# Altium PCB addl.PcbDoc
Units mm, origin at the board's own origin, x right, y up, seen from the top; angles counter-clockwise.
Board outline 82.66 x 56.61 mm, 2 copper layers (Top Layer, Bottom Layer); 78 components, 87 nets, 309 pads, 108 vias.
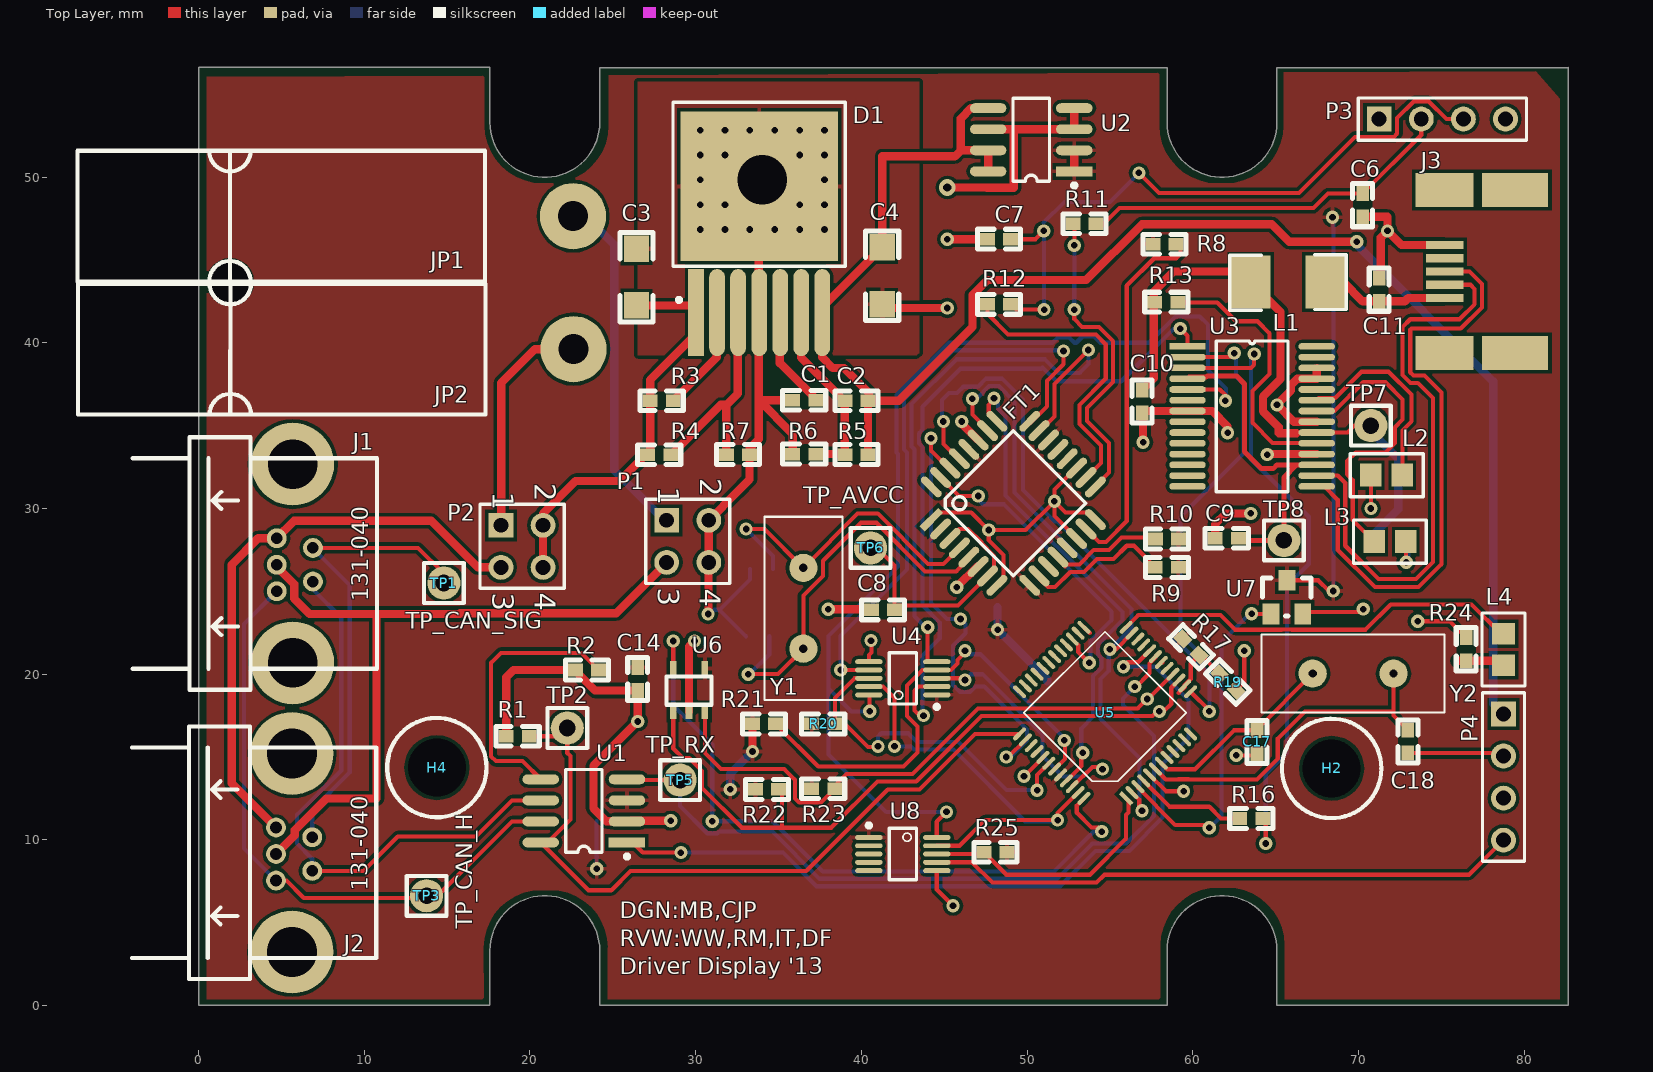
[diagram p0: Top Layer view]
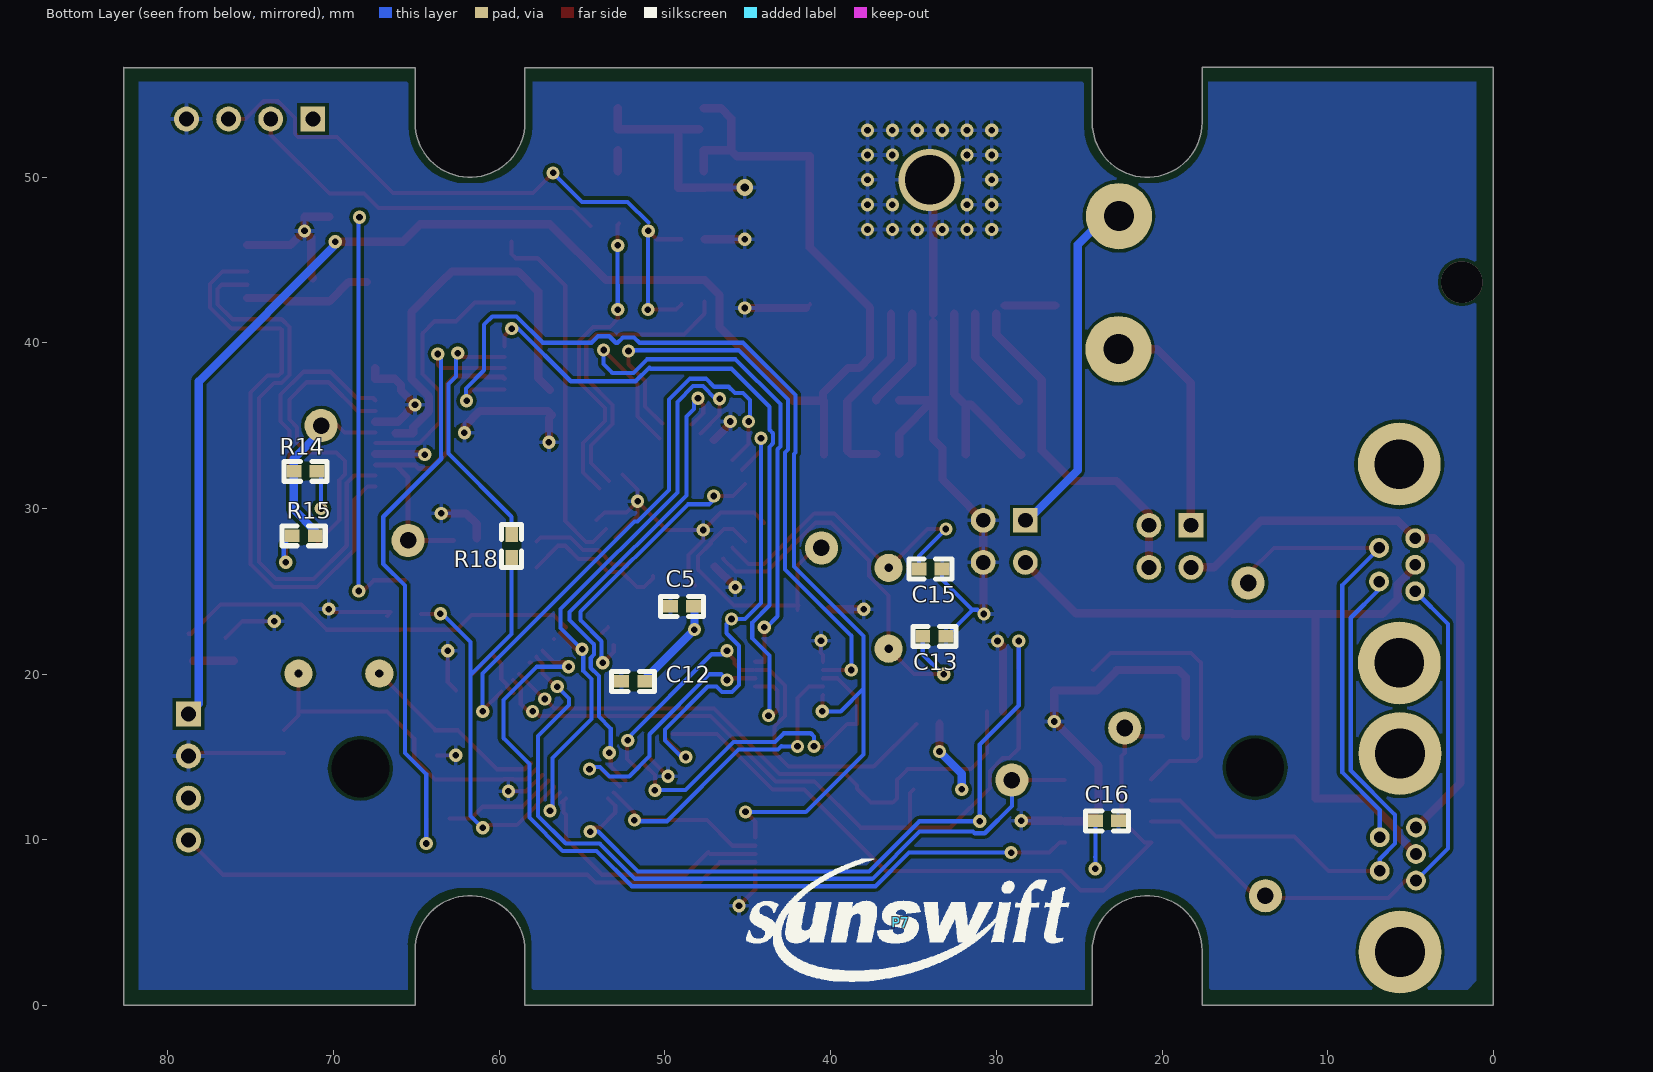
[diagram p1: Bottom Layer view, seen from below]

## Layer stack, top to bottom
Top Layer: signal copper 0.0356
Dielectric: core 0.32, FR-4, Dk 4.8
Bottom Layer: signal copper 0.0356

## Board outline
17.58,0.01 17.58,3.32 cw(c20.895,3.32) 24.21,3.32 24.21,0.01 58.45,0.01 58.45,3.32 cw(c61.765,3.32) 65.08,3.32 65.08,0.01 65.085,0.005 82.66,0.005 82.66,56.615 82.655,56.61 65.08,56.61 65.08,53.3 cw(c61.765,53.3) 58.45,53.3 58.45,56.61 24.21,56.61 24.21,53.3 cw(c20.895,53.3) 17.58,53.3 17.58,56.615 0,56.615 0,0.005 0.005,0.01

## Design rules (kind name [scope] priority, off if disabled: settings)
Clearance [All] p1: gap=0.2
ComponentClearance [All] p1: gap=0.05 collisioncheckmode=3 verticalgap=0.254 showdistances=FALSE
FabricationTestPointUsage TestPointUsage [All] p1: valid=0 allowmultiple=FALSE
FabricationTestpoint Testpoint [(IsPad And (OnTopLayer Or OnBottomLayer))] p1: side=3 testpointundercomponent=TRUE minsize=1.016 maxsize=2.54 preferedsize=1.524 minholesize=0 maxholesize=1.016 preferedholesize=0.813 testpointgrid=0.025 allowsidetop=TRUE allowsidebottom=TRUE usegrid=TRUE gridtolerance=0
HoleSize [All] p1: absolutevalues=TRUE maxlimit=6 minlimit=0.025 maxpercent=80.000 minpercent=20.000
HoleToHoleClearance [All] p1: gap=0.1 allowstackedmicrovias=TRUE
MinimumSolderMaskSliver [All] p1 off: minsoldermaskwidth=0.2
PolygonConnect [All] p1: connectstyle=Relief reliefconductorwidth=0.254 reliefentries=4 polygonreliefangle="90 Angle"
RoomDefinition USB-SERIAL [InComponentClass('USB-SERIAL')] p1 off: confinementstyle=ConfineIn formatcopy=TRUE lockcomponents=FALSE outline -67.26,-46.78 -16.46,-46.78 -16.46,-21.38 -67.26,-21.38
RoomDefinition main-sch [InComponentClass('main-sch')] p2 off: confinementstyle=ConfineIn formatcopy=TRUE lockcomponents=FALSE outline -67.26,-46.78 -16.46,-46.78 -16.46,-21.38 -67.26,-21.38
RoomDefinition LPC11C14 [InComponentClass('LPC11C14')] p3 off: confinementstyle=ConfineIn formatcopy=TRUE lockcomponents=FALSE outline -67.26,-46.78 -16.46,-46.78 -16.46,-21.38 -67.26,-21.38
RoomDefinition FT311D [InComponentClass('FT311D')] p4 off: confinementstyle=ConfineIn formatcopy=TRUE lockcomponents=FALSE outline -67.26,-46.78 -16.46,-46.78 -16.46,-21.38 -67.26,-21.38
RoomDefinition DC-DC [InComponentClass('DC-DC')] p5 off: confinementstyle=ConfineIn formatcopy=TRUE lockcomponents=FALSE outline -67.26,-46.78 -16.46,-46.78 -16.46,-21.38 -67.26,-21.38
RoomDefinition CAN [InComponentClass('CAN')] p6 off: confinementstyle=ConfineIn formatcopy=TRUE lockcomponents=FALSE outline -67.26,-46.78 -16.46,-46.78 -16.46,-21.38 -67.26,-21.38
RoutingVias RoutingVias_2 [(InNet('NetF2_1') OR InNet('USBGND'))] p1: holewidth=0.7 width=1.27 viastyle="Through Hole" minholewidth=0.4 minwidth=0.8 maxholewidth=0.7 maxwidth=1.27
RoutingVias RoutingVias_1 [All] p2: holewidth=0.4 width=0.8 viastyle="Through Hole" minholewidth=0.4 minwidth=0.8 maxholewidth=0.4 maxwidth=0.8
RoutingVias [All] p3 off: holewidth=0.5 width=1 viastyle="Through Hole" minholewidth=0.4 minwidth=0.8 maxholewidth=0.5 maxwidth=1
SilkToSilkClearance [All] p1 off: silktosilkclearance=0.1
SilkscreenOverComponentPads [All] p1 off: minsilkscreentomaskgap=0.254
SolderMaskExpansion [All] p1: expansion=0.102
Width [All] p1: maxlimit=0.5 minlimit=0.25 preferedwidth=0.25
20 further rules are at their usual default settings.

## Classes and differential pairs
component class main-sch: H1 H2 H4 P4
component class USB-SERIAL: C9 C10 C11 J3 L1 L2 L3 R13 R14 R15 TP7 TP8 U3
component class LPC11C14: C12 C14 C17 C18 L4 R16 R17 R18 R19 R20 R21 R22 R23 R24 R25 U4 U5 U6 U7 U8 Y2
component class FT311D: C5 C6 C7 C8 C13 C15 FT1 P3 R8 R9 R10 R11 R12 TP6 Y1
component class DC-DC: C1 C2 C3 C4 D1 JP1 JP2 P1 P2 R3 R4 R5 R6 R7 U2
component class CAN: C16 J1 J2 R1 R2 TP1 TP2 TP3 TP5 U1

## Components (designator, comment, footprint, x,y, rotation, side; value= is the part's Value field where it differs from the comment)
C1 "CAP" 0603 37.25,36.53 r180 top
C2 "CAP" 0603 39,36.5 r0 top
C3 "CAP" 1206 26.435,42.25 r90 top
C4 "CAP" 1206 41.254,45.75 r270 top
C5 "CAP" 0603 48.265,24.09 r0 bottom
C6 "CAP" 0603 70.25,49 r270 top
C7 "CAP" 0603 49,46.25 r180 top
C8 "CAP" 0603 42,23.883 r180 top
C9 "CAP" 0603 62.75,28.202 r180 top
C10 "CAP" 0603 56.941,35.76 r90 top
C11 "CAP" 0603 71.25,42.5 r90 top
C12 "CAP" 0603 51.217,19.563 r0 bottom
C13 "CAP" 0603 34.438,22.283 r180 bottom
C14 "CAP" 0603 26.5,20.407 r270 top
C15 "CAP" 0603 34.668,26.346 r180 bottom
C16 "CAP" 0603 22.627,11.147 r0 bottom
C17 "CAP" 0603 63.872,16.611 r270 top
C18 "CAP" 0603 72.981,16.637 r270 top
D1 "DC-DC SWITCHER" PFM-7 30.02,42.331 r90 top
FT1 "FT311D" QFP32 44.785,30.431 r45 top
H2 "HOLE" M2.5 68.38,14.31 r0 top
H4 "HOLE" M2.5 14.38,14.36 r0 top
J1 "CON5-S" TRIAD5F 6.9,27.617 r90 top
J2 "CON5-S" TRIAD5F 6.858,10.16 r90 top
J3 "USB_MINIB" USBMINIB 82.75,38.5 r180 top
JP1 "PGND" POWERPOLE25A 36.191,47.641 r90 top
JP2 "CON1" POWERPOLE25A 36.216,39.616 r90 top
L1 "INDUCTOR" 1812 68,43.663 r180 top
L2 "LED" 0805LED 70.75,32.01 r0 top
L3 "LED" 0805LED 72.847,28 r180 top
L4 "LED for Blink Testing" 0805LED 78.75,22.436 r270 top
P1 "Header 2X2" HDR2X2 28.25,29.286 r270 top
P2 "Header 2X2" HDR2X2 18.25,28.985 r270 top
P3 "Header 4" HDR1X4 71.25,53.5 r0 top
P4 "Header 4" HDR1X4 78.75,17.599 r270 top
P7 "SUN_LOGO" SUNSWIFTLOGO 35.781,5.011 r180 bottom (schematic designator P1)
R1 "RES1" 0603 18.559,16.253 r0 top
R2 "For normal operation, ground AB. To implement autobaud, pull AB high." 0603 22.75,20.25 r0 top
R3 "RES1" 0603 27.25,36.5 r0 top
R4 "RES1" 0603 28.5,33.239 r180 top
R5 "RES1" 0603 39,33.25 r0 top
R6 "RES1" 0603 37.25,33.28 r180 top
R7 "RES1" 0603 33.25,33.25 r180 top
R8 "Leave Open for SPI(Slave)" 0603 58.998,45.944 r180 top
R9 "RES1" 0603 57.734,26.441 r0 top
R10 "Leave open for UART" 0603 57.746,28.154 r0 top
R11 "27" 0603 54.164,47.183 r180 top
R12 "RES1" 0603 49,42.321 r180 top
R13 "RES1" 0603 57.7,42.448 r0 top
R14 "RES1" 0603 71,32.24 r0 bottom
R15 "RES1" 0603 72.5,28.347 r180 bottom
R16 "Res Semi" 0603 64.232,11.289 r180 top
R17 "Res Semi" 0603 60.388,21.146 r135 top
R18 "Res Semi" 0603 59.25,28.431 r270 bottom
R19 "Res Semi" 0603 62.607,19.03 r135 top
R20 "RES1" 0603 38.397,17 r180 top
R21 "RES1" 0603 34.827,17 r180 top
R22 "Res Semi" 0603 35,13.043 r180 top
R23 "Res Semi" 0603 38.397,13.083 r180 top
R24 "RES1" 0603 76.5,20.803 r90 top
R25 "RES1" 0603 47.388,9.25 r0 top
TP1 "TP_CAN_SIG" TESTPOINT 14.8,25.5 r180 top
TP2 "TEST" TESTPOINT 22.25,16.75 r180 top
TP3 "TP_CAN_H" TESTPOINT 13.759,6.625 r0 top
TP5 "TP_RX" TESTPOINT 29.061,13.605 r0 top
TP6 "TP_AVCC" TESTPOINT 40.553,27.617 r90 top
TP7 "TP_USB5V" TESTPOINT 70.75,35 r90 top
TP8 "TP_USB3V3" TESTPOINT 65.5,28.069 r0 top
U1 "SN65HVD235. LPC can pull Rs Hi for standby mode" SO8 23.251,11.75 r90 top
U2 "MIC5200" SO8 50.25,52.25 r90 top
U3 "FT232R" SSOP28w 63.5,35.5 r0 top
U4 "Dual Analog Switches for FT311D signals selection" MICRO10 42.5,19.75 r180 top
U5 "LPC11C14" QFP48 55.994,12.502 r135 top
U6 "24AAXX" SOT23-5 28.647,17.75 r0 top
U7 "XC61CN2002MR" SOT23-3 64.721,23.633 r0 top
U8 "Dual Analog Switches for LCD signal selection for serial LCD" Micro10 42.5,9.144 r0 top
Y1 "12 MHz" HC49/4H 36.5,29.5 r270 top
Y2 "12 MHz" HC49/4H 75.2,20.035 r180 top

## Footprints (in the part's own frame and the unit in brackets; to place one, negate y for a bottom-side part, rotate by r counter-clockwise, add the part's x,y. Pads: shape width x height; smd on the part's side, far side on the other; paste and mask are expansions set on the pad)
0603 [mil]
  rect 35.43x30 smd: 1(0,0) 2(55,0)
  silkscreen extent -24,-24 79,24
0805LED [mm]
  rect 1.3x1.4 smd: A(0,0) K(1.9,0)
  silkscreen extent -1.25,-1.3 3.15,1.3
1206 [mil]
  rect 62.99x60 smd: 1(0,0) 2(135,0)
  silkscreen extent -39,-39 173,39
1812 [mm]
  rect 2.4x3.2 smd: 1(0,0) 2(4.5,0)
  silkscreen extent -1.27,-1.66 5.77,1.7
HC49/4H [mm]
  round 1.7 hole 0.5: 1(3.085,0) 2(7.965,0)
  silkscreen extent 0,-2.35 11.05,2.35
HDR1X4 [mm] "Connector; Header; 4 Position"
  rect 1.5x1.5 hole 0.9: 1(0,0)
  round 1.5 hole 0.9: 2(2.54,0) 3(5.08,0) 4(7.62,0)
  silkscreen extent -1.27,-1.27 8.89,1.27
HDR2X2 [mm] "Connector; Header; 2x2 Position"
  rect 1.5x1.5 hole 0.9: 1(0,0)
  round 1.5 hole 0.9: 2(0,2.54) 3(2.54,0) 4(2.54,2.54)
  silkscreen extent -1.27,-1.27 3.81,3.81
M2.5 [mm]
  round 0 hole 3.5: 1(0,0)
  silkscreen extent -3,-3 3,3
MICRO10 [mm] "Micro10 package for e.g. nlas4684"
  oval 1.65x0.3 smd: 1(-2.05,1) 2(-2.05,0.5) 3(-2.05,0) 4(-2.05,-0.5) 5(-2.05,-1) 6(2.05,-1) 7(2.05,-0.5) 8(2.05,0) 9(2.05,0.5) 10(2.05,1)
  silkscreen extent -2.18,-1.55 0.82,1.85, body extent -1.55,-1.55 1.55,1.55, height 1.1
Micro10 [mm] "Micro10 package for e.g. nlas4684"
  oval 1.65x0.3 smd: 1(-2.05,1) 2(-2.05,0.5) 3(-2.05,0) 4(-2.05,-0.5) 5(-2.05,-1) 6(2.05,-1) 7(2.05,-0.5) 8(2.05,0) 9(2.05,0.5) 10(2.05,1)
  silkscreen extent -2.17,-1.55 0.82,1.85, body extent -1.55,-1.55 1.55,1.55, height 1.1
PFM-7 [mm] "SOP, 14-Leads, Body 10.4x9.9mm (max), Pitch 1.27mm, IPC Low Density"
  rect 5.25x0.95 smd: 1(-0.508,0)
  oval 5.25x0.95 smd: 2(-0.508,-1.27) 3(-0.508,-2.54) 4(-0.508,-3.81) 5(-0.508,-5.08) 6(-0.508,-6.35) 7(-0.508,-7.62)
  rect 9x9.5 smd: 4(7.112,-3.81)
  silkscreen extent 0.13,-9.01 12.19,1.39, body extent 2.53,-9.02 12.38,1.4, height 4.57
POWERPOLE25A [mm]
  round 4 hole 1.8: 1(0,13.589)
  silkscreen extent -3.95,18.9 3.95,43.5
QFP32 [mm]
  rect 1.6x0.45 smd: 1(-1.184,-0.384)
  oval 1.6x0.45 smd: 2(-1.184,-1.184) 3(-1.184,-1.984) 4(-1.184,-2.784) 5(-1.184,-3.584) 6(-1.184,-4.384) 7(-1.184,-5.184) 8(-1.184,-5.984) 17(7.216,-5.984) 18(7.216,-5.184) 19(7.216,-4.384) 20(7.216,-3.584) 21(7.216,-2.784) 22(7.216,-1.984) 23(7.216,-1.184) 24(7.216,-0.384)
  oval 0.45x1.6 smd: 9(0.216,-7.384) 10(1.016,-7.384) 11(1.816,-7.384) 12(2.616,-7.384) 13(3.416,-7.384) 14(4.216,-7.384) 15(5.016,-7.384) 16(5.816,-7.384) 25(5.816,1.016) 26(5.016,1.016) 27(4.216,1.016) 28(3.416,1.016) 29(2.616,1.016) 30(1.816,1.016) 31(1.016,1.016) 32(0.216,1.016)
  silkscreen extent -0.08,-6.28 6.12,-0.08
QFP48 [mm]
  rect 1x0.26 smd: 1(0.013,0.01)
  oval 1x0.26 smd: 2(0.013,-0.49) 3(0.013,-0.99) 4(0.013,-1.49) 5(0.013,-1.99) 6(0.013,-2.49) 7(0.013,-2.99) 8(0.013,-3.49) 9(0.013,-3.99) 10(0.013,-4.49) 11(0.013,-4.99) 12(0.013,-5.49) 25(9.113,-5.49) 26(9.113,-4.99) 27(9.113,-4.49) 28(9.113,-3.99) 29(9.113,-3.49) 30(9.113,-2.99) 31(9.113,-2.49) 32(9.113,-1.99) 33(9.113,-1.49) 34(9.113,-0.99) 35(9.113,-0.49) 36(9.113,0.01)
  oval 0.26x1 smd: 13(1.813,-7.29) 14(2.313,-7.29) 15(2.813,-7.29) 16(3.313,-7.29) 17(3.813,-7.29) 18(4.313,-7.29) 19(4.813,-7.29) 20(5.313,-7.29) 21(5.813,-7.29) 22(6.313,-7.29) 23(6.813,-7.29) 24(7.313,-7.29) 37(7.313,1.81) 38(6.813,1.81) 39(6.313,1.81) 40(5.813,1.81) 41(5.313,1.81) 42(4.813,1.81) 43(4.313,1.81) 44(3.813,1.81) 45(3.313,1.81) 46(2.813,1.81) 47(2.313,1.81) 48(1.813,1.81)
  silkscreen extent 1.1,-6.2 8.03,0.73
SO8 [mm]
  rect 0.6x2.2 smd: 1(-1.905,-2.6)
  oval 0.6x2.2 smd: 2(-0.635,-2.6) 3(0.635,-2.6) 4(1.905,-2.6) 5(1.905,2.6) 6(0.635,2.6) 7(-0.635,2.6) 8(-1.905,2.6)
  silkscreen extent -2.88,-2.72 2.5,1.1
SOT23-3 [mm]
  rect 1x1.25 smd: 1(0,0) 2(1.905,0) 3(0.965,2.032)
  silkscreen extent -0.51,-0.13 2.41,2.16
SOT23-5 [mm]
  rect 0.4x0.9 smd: 1(0,0) 2(0.953,0) 3(1.91,0) 4(1.91,2.59) 5(0,2.59)
  silkscreen extent -0.4,0.4 2.3,2.1
SSOP28w [mm]
  rect 2.2x0.4 smd: 1(-3.82,4.28)
  oval 2.2x0.4 smd: 2(-3.82,3.63) 3(-3.82,2.98) 4(-3.82,2.33) 5(-3.82,1.68) 6(-3.82,1.03) 7(-3.82,0.38) 8(-3.82,-0.27) 9(-3.82,-0.92) 10(-3.82,-1.57) 11(-3.82,-2.22) 12(-3.82,-2.87) 13(-3.82,-3.52) 14(-3.82,-4.17) 15(3.98,-4.17) 16(3.98,-3.52) 17(3.98,-2.87) 18(3.98,-2.22) 19(3.98,-1.57) 20(3.98,-0.92) 21(3.98,-0.27) 22(3.98,0.38) 23(3.98,1.03) 24(3.98,1.68) 25(3.98,2.33) 26(3.98,2.98) 27(3.98,3.63) 28(3.98,4.28)
  silkscreen extent -2.09,-4.5 2.25,4.6
SUNSWIFTLOGO [mm] "Sunswift Logo"
  silkscreen extent -9.32,-3.58 10.19,3.81
TESTPOINT [mm] "Test point pad"
  round 2 hole 1: 0(0,0)
  silkscreen extent -1.2,-1.2 1.2,1.2
TRIAD5F [mm]
  round 5 hole 3: 0(-6.934,1.219) 0(5.055,1.219)
  round 1.2 hole 0.7: 1(0,0) 2(0.584,2.184) 3(-1.016,2.184) 4(-2.616,2.184) 5(-2.032,0)
  silkscreen extent -8.56,-3.86 6.68,10.87
USBMINIB [mm]
  rect 2.25x0.5 smd mask+0: 1(7.55,-4.2) 2(7.55,-5) 3(7.55,-5.8) 4(7.55,-6.6) 5(7.55,-7.4)
  rect 1.2x6.4 on Top Overlay mask+0: 2(0.498,-5.8)
  rect 4x2.05 smd mask+0: 6(3.3,-0.875) 6(3.3,-10.725)
  rect 3.5x2.05 smd mask+0: 6(7.55,-0.875) 6(7.55,-10.725)

## Part data
C1 C2 C3 C4 C5 C8 C9 C10 C11 C12 C13 C14 C15 C16 C17 C18: "Capacitor"
C6 C7: library part CAP1, "Capacitor"
D1: library part lmz12001
FT1: "USB ANDROID Host IC"
H2 H4: "Hole"
J1 J2: "Connector, 2 pin, with shield @ S"
J3: library part USB_miniB_SMT, "USB Mini B Connector"
JP1: library part CON1, "Power Ground (currently assumed that it is provided through a min-anderson connector)"
JP2: "Currently assumed that the mini-anderson connector provides 12V"
L1: "Inductor"
L4: library part LED
P1 P2: "Header, 2-Pin, Dual row"
P3 P4: "Header, 4-Pin"
R1 R3 R4 R5 R6 R7 R9 R12 R13 R14 R15 R20 R21 R24 R25: "Resistor"
R2 R8 R10 R11: library part RES1, "Resistor"
R16 R17 R18 R19 R22 R23: "Semiconductor Resistor"
TP1: library part TEST, "TEST POINT for 12V on CAN"
TP2: "TEST POINT"
TP3 TP5 TP6 TP7 TP8: library part TEST, "TEST POINT"
U1: library part SN65HVD235, "3.3V CAN XCVR W/STANDBY"
U2: "MIC5200 - SO8"
U4 U8: library part NLAS4684, "Ultra-low resistance dual SPDT Analog switch"
U5: library part LPC11C14_Full, "NXP LPC11C14 Microcontroller"
U6: "I2C EEPROM for SOT23-5 package"
U7: library part XC61F, "SOT23 reset generator"
Y1 Y2: library part CRYSTAL, "Crystal"

## Via types
v1: diameter 0.8, hole 0.4, Top Layer to Bottom Layer, 105 vias
v2: diameter 3.75, hole 3, Top Layer to Bottom Layer, 1 vias
v3: diameter 2.5, hole 2.5, Top Layer to Bottom Layer, 1 vias
v4: diameter 1, hole 0.5, Top Layer to Bottom Layer, 1 vias

## Nets (pads, with @x,y where several pads share a name; then routed paths per layer and width w, separated by ;. In a path a pad name is that pad's centre, name@x,y a point inside that pad or via, vN(x,y) a via of type N, cw(c..) or ccw(c..) an arc to the next point about the centre after c; other vN are vias at no path point)
3V3: C5.1 C12.1 C14.1 C16.2 FT1.2 FT1.9 FT1.13 FT1.22 FT1.28 R8.2 R9.2 R10.2 R17.2 R20.2 R21.2 R22.2 R23.2 R25.2 U1.3 U2.1 U2.2 U4.1 U5.8 U5.44 U6.4 U7.3 U8.1 | length 40
  Top Layer w0.25: U7.3 67.569,25.665 68.218,25.016 v1(68.471,25.016)
  Top Layer w0.5: v1(33.43,15.332) R21.2 ; U2.1 U2.2
  Bottom Layer w0.25: v1@24.024,8.253 24.024,8.978 ; C16.2 24.024,8.978 ; 24.027,8.975 24.024,8.978 ; v1@68.5,25.016 v1@68.5,47.508
  Bottom Layer w0.5: v1(32.085,13.043) 32.085,13.987 v1(33.43,15.332) ; C5.1@48.22,24.044 v1(48.22,22.687) 51.217,19.69 C12.1
  other v1: 24.027,8.25 68.428,47.58
5V: C2.2 C4.1 D1.7 P4.1 R5.2 U2.5 U2.7 U2.8 | length 100.2
  Top Layer w0.5: R5.2 C2.2 42.258,36.5 46.703,40.945 46.703,42.888 47.599,43.784 53.57,43.784 56.934,47.148 64.767,47.148 65.816,46.099 v1(69.893,46.099) ; C2.2@40.463,36.566 40.463,36.962 38.945,38.48 38.27,38.48 37.62,39.13 37.62,42.116 C4.1 41.254,51.25 45.635,51.25 46,51.615 ; U2.8 U2.7 46,51.615 ; U2.5 46.621,54.155 46,53.534 46,51.615
  Bottom Layer w0.5: v1@69.806,46 78.131,37.675 78.131,18.218 P4.1
12V: C3.1 D1.1 P2.2 P2.4 R3.1 R4.2 | length 23.7
  Top Layer w0.5: P2.4 P2.2 20.79,29.692 22.751,31.653 25.403,31.653 27.25,33.5 27.25,37.75 30,40.5 D1.1@30,41.742 ; C3.1 29.492,42.25
\D\T\R\: R18.1 U3.2 | length 15.6
  Top Layer w0.25: U3.2 62.311,39.13 v1(62.5,39.375) v1@62.5,39.356
  Bottom Layer w0.25: R18.1 59.25,29.5 63.067,33.317 63.067,37.509 62.606,37.97 v1@62.606,39.269
\R\T\S\: R16.1 U3.3 | length 38.2
  Top Layer w0.25: U3.3 63.515,38.48 63.514,38.481 63.702,38.669 v1(63.702,39.321) ; v1(64.407,9.776) R16.1@64.407,11.289
  Bottom Layer w0.25: v1@63.517,39.137 63.517,33.131 63.5,33.114 63.5,33 67,29.5 67,26.652 65.691,25.343 65.691,15.25 64.407,13.966 v1(64.407,9.776)
CAN_12V: J1.2 J2.2 P2.3 | length 35.5
  Top Layer w0.5: J2.2 2,13.418 2,26.601 3.6,28.202 J1.2 5.764,29.25 14.048,29.25 16.853,26.445 P2.3
CAN_GND: J1.3 J2.3 P1.3 | length 45.4
  Top Layer w0.5: J2.3 5.808,10.278 5.808,10.595 7.713,12.5 10.743,12.5 10.743,23.633 ; J1.3 4.716,26.486 5.766,25.436 5.766,24.565 5.764,24.563 6.694,23.633 10.743,23.633 ; 14.8,23.625 14.792,23.633 ; P1.3@28.241,26.717 25.199,23.675 15.792,23.675 15.75,23.633 14.792,23.633 ; 10.743,23.633 14.792,23.633
CAN_H: J1.4 J2.4 TP3.0 U1.7 | length 37.4
  Top Layer w0.25: J2.4 5.304,7.544 6.348,6.5 11.202,6.5 TP3.0@13.836,6.5 ; TP3.0 14.431,6.625 18.921,11.115 U1.7
  Bottom Layer w0.25: J2.4 2.75,9.467 2.75,23.036 J1.4
CAN_L: J1.5 J2.5 U1.6 | length 35.2
  Top Layer w0.25: J2.5 9.943,8.128 12.02,10.205 16.744,10.205 18.924,12.385 U1.6
  Bottom Layer w0.254: J2.5 6.858,8.849 5.931,9.776 5.931,11.509 8.611,14.188 8.611,23.401 6.9,25.112 J1.5
CAN_RX: TP5.0 U1.4 U5.19 | length 48.5
  Top Layer w0.25: U1.4@25.901,13.605 TP5.0 TP5.0@29.326,13.34 ; v1@56.5,19.17 57.382,20.053 57.382,20.632 57.746,20.995 U5.19
  Bottom Layer w0.25: TP5.0 29.061,12.036 30.7,10.398 31.3,10.398 31.402,10.5 34.634,10.5 37.484,7.65 51.811,7.65 53.936,9.775 55.983,9.775 57.658,11.45 57.658,16.275 55.787,18.146 55.787,18.537 v1(56.5,19.25)
CAN_SIG: J1.1 J2.1 TP1.0 | length 28.4
  Top Layer w0.25: J1.1 13.25,27.617 14.8,26.067 TP1.0
  Bottom Layer w0.25: J2.1 6.858,11.797 9.119,14.057 9.119,25.375 6.9,27.593 J1.1
CAN_TX: U1.1 U5.20 | length 49.3
  Top Layer w0.25: U1.1 26.191,9.845 26.805,9.231 v1(29.11,9.231) ; v1@56.073,20.72 56.699,20.72 U5.20
  Bottom Layer w0.25: v1(29.11,9.231) 35.266,9.231 37.297,7.2 51.998,7.2 54.123,9.325 56.169,9.325 58.183,11.338 58.183,14.567 59.75,16.135 59.75,18.433 57.739,20.444 v1(55.814,20.444)
EEPROM_WP: U5.48 U6.5 | length 42.4
  Top Layer w0.25: U6.5 v1(28.647,22) ; U5.48 53,12.071 53,11.636 53.886,10.75 54.275,10.75 54.5,10.525 v1(54.5,10.5)
  Bottom Layer w0.25: v1(28.647,22) 28.647,18.103 31,15.75 v1(31,11.123) ; v1@31,10.996 v1(31,11.123) ; v1(54.5,10.5) 54.025,10.5 51.625,8.1 37.67,8.1 34.647,11.123 v1(31,11.123)
FT311D_RX: FT1.24 U4.7 | length 35.6
  Top Layer w0.25: v1(38.75,20.25) U4.7 ; FT1.24@50.159,35.123 51.2,36.164 51.2,37.702 52.2,38.702 v1(52.2,39.5)
  Bottom Layer w0.25: v1(38.75,20.25) 38.75,22.314 42.75,26.314 42.75,33.387 42.575,33.562 42.575,36.575 45.55,39.55 v1@51.95,39.55
FT311D_RX_: FT1.23 U4.5 | length 36.5
  Top Layer w0.25: v1(44,22.827) 44,20.75 U4.5 ; FT1.23@50.334,34.232 51.653,35.551 51.653,37.519 v1(53.7,39.566)
  Bottom Layer w0.25: v1(44,22.827) 43.866,22.827 43.2,23.493 43.2,33.573 43.025,33.748 43.025,36.295 45.73,39 51.075,39 51.9,38.175 53.175,38.175 53.714,38.714 53.714,39.552 v1(53.7,39.566)
GND: C1.2 C3.2 C4.2 C5.2 C6.2 C7.2 C8.2 C9.2 C10.1 C11.2 C12.2 C13.2 C14.2 C15.2 C16.1 C17.2 C18.2 D1.4 FT1.1 FT1.6 FT1.8 FT1.14 FT1.16 FT1.19 FT1.27 J3.5 P1.2 P1.4 P3.4 P4.2 R1.1 R2.1 R6.2 R7.1 R19.1 R24.2 U1.2 U2.3 U2.4 U2.6 U3.7 U3.18 U3.21 U3.25 U3.26 U4.6 U5.5 U5.41 U6.2 U7.2 U8.6 | length 169.1
  Top Layer w0.25: U4.6 40.45,21.146 40.603,21.299 40.603,22.001 v1(40.58,22.024) ; C4.2 C4.2@41.481,42.094 ; FT1.1@44.015,29.135 44.628,29.748 46.633,29.748 v1(47.683,28.697) ; U8.6 44.55,7.006 v1(45.532,6.024) ; FT1.8 48.57,25.754 48.57,27.199 47.683,28.086 v1(47.683,28.697) ; v1(49.813,13.834) U5.41 ; FT1.19@52.558,32.042 51.65,31.134 v1(51.65,30.431) ; FT1.14@52.987,28.213 51.65,29.55 v1(51.65,30.431) ; FT1.16@54.119,29.293 53.651,29.761 52.321,29.761 v1(51.65,30.431) ; U5.5 58.374,12.936 v1(59.446,12.936) v1@59.353,12.842 ; R19.1 63.107,19.53 v1(63.107,21.413) ; v1(62.622,15.099) C17.2@63.757,15.099 ; U7.2@66.759,23.5 66.648,23.65 66.568,23.757 v1@70.289,23.757 ; v1@70.286,23.931 v1(70.289,23.927) ; C18.2 78.569,15.24 P4.2 ; v1(73.572,23.196) 75.503,23.196 R24.2 ; v1(47.683,28.697) 49.916,28.697 v1(51.65,30.431)
  Top Layer w0.5: R1.1@18.559,16.25 18.559,19.809 19,20.25 R2.1 22.75,20.18 23.92,19.01 C14.2 v1(26.5,17.145) 23.835,14.48 23.835,11.899 24.619,11.115 U1.2 ; U1.2@26.113,11.147 v1(28.501,11.147) ; U6.2 29.6,21.673 v1(29.927,22) ; v1@30.776,23.827 P1.4@30.776,26.719 ; P1.4 P1.2 32.5,30.996 32.5,31 33.25,31.75 R7.1 33.25,33.63 33.81,34.19 33.81,36.53 ; D1.4@33.81,41.25 33.81,36.53 ; D1.4@33.81,41.742 D1.4@33.81,49.362 ; R6.2 35.853,34.487 33.81,36.53 ; C1.2 33.81,36.53 ; v1(38,23.909) 40.077,23.909 40.103,23.883 ; C4.2@41.481,42.094 v1(45.175,42.094) ; v1(45.189,46.25) C7.2 ; v4@45.308,49.369 47.562,49.369 47.562,49.362 49.2,49.362 49.2,52.75 ; v1(45.75,25.25) FT1.6@46.994,26.494 ; v1(46.051,35.248) 46.051,35.128 FT1.27 ; U2.6@47.92,52.885 U2.3 U2.4 ; C10.1@56.818,35.637 57,35.455 v1(57,34) ; C10.1 C10.1@57.061,35.88 ; C10.1@57.044,35.88 U3.7 61.175,35.88 62.1,34.955 v1(62.1,34.574) ; C9.2 61.353,29.055 62,29.702 v1(63.5,29.702) ; v1(64.5,33.25) 64.5,33.28 U3.18 ; U3.21 66.115,35.23 65.139,36.206 65.139,36.332 65.93,37.124 65.93,37.449 66.311,37.83 U3.25 U3.26 ; C6.2 71.75,47.603 v1(71.75,46.75) ; C11.2 71.35,43.997 71.35,46.35 v1(71.75,46.75) ; J3.5 72.6,45.9 v1(71.75,46.75)
  Bottom Layer w0.25: v1@30.75,23.504 31.129,23.883 31.441,23.883 ; C13.2 31.441,23.883 ; C15.2 33.271,25.713 31.441,23.883
  other v1: 30.75,23.633 65.082,36.25 30.27,46.831 31.77,46.831 33.27,46.831 34.77,46.831 36.27,46.831 37.77,46.831 30.27,48.331 31.77,48.331 36.27,48.331 37.77,48.331 30.27,49.831 37.77,49.831 30.27,51.331 31.77,51.331 36.27,51.331 37.77,51.331 30.27,52.831 31.77,52.831 33.27,52.831 34.77,52.831 36.27,52.831 37.77,52.831
  other v2: 34.02,49.831
  other v4: 45.189,49.369
LPC_RX_232: U3.1 U4.2 | length 43
  Top Layer w0.25: v1@43.693,17.307 43.2,17.8 43.2,19 43.45,19.25 U4.2 ; v1@59.25,40.853 59.68,40.423 U3.1
  Bottom Layer w0.25: v1(43.75,17.5) 43.75,17.307 43.693,17.25 43.693,21.131 44.725,22.163 44.725,23.127 43.693,24.159 43.693,33.717 43.475,33.934 43.475,34.535 43.693,34.753 43.693,36.136 45.989,38.432 50.87,38.432 50.939,38.5 51.764,37.675 55.681,37.675 58.861,40.855 v1(59.25,40.855)
LPC_TX_232: U3.5 U4.10 U8.10 | length 67.9
  Top Layer w0.25: U4.10 40.5,18.7 v1@40.5,17.734 ; U8.10 44.55,11.097 v1(45.138,11.685) ; U3.5 61.626,37.18 61.968,36.838 v1(61.968,36.5)
  Bottom Layer w0.25: v1(40.5,17.757) 39.39,17.757 38.025,19.122 ; v1(45.138,11.685) 41.498,11.685 38.025,15.158 38.025,19.122 ; v1(61.968,36.5) 61.968,36.289 62.178,36.5 62.007,36.5 62.007,37.243 60.911,38.339 60.911,41.089 60.42,41.58 58.95,41.58 57.37,40 54.433,40 54.042,40.391 53.358,40.391 52.967,40 52.867,40 52.542,40.325 51.858,40.325 51.533,40 45.282,40 42.125,36.843 42.125,33.375 42.216,33.284 42.216,26.499 38.025,22.308 38.025,19.122
NetC1_1: C1.1 D1.5 | length 6.1
  Top Layer w0.5: D1.5@35.08,41.742 35.08,38.77 37.25,36.6 C1.1
NetC2_1: C2.1 D1.6 R5.1 R6.1 | length 11.2
  Top Layer w0.5: D1.6@36.35,41.742 36.35,39.103 39,36.453 39,33.5 38.78,33.28 R6.1
NetC6_1: C6.1 P3.2 R11.1 | length 22.5
  Top Layer w0.25: R11.1@54.496,47.046 55.588,48.138 67.289,48.138 68.152,49 C6.1 73.79,52.54 P3.2
NetC7_1: C7.1 P3.3 R12.1 | length 39.5
  Top Layer w0.25: R12.1 49.321,42 v1(51.025,42) ; C7.1 50.5,46.25 v1(51,46.75) ; v1(56.75,50.25) 57.962,49.038 66.402,49.038 69.789,52.425 72.135,52.425 72.325,52.615 72.325,53.555 73.345,54.575 74.235,54.575 75.31,53.5 P3.3
  Bottom Layer w0.25: 51,47.25 52.25,48.5 55,48.5 v1(56.75,50.25) ; v1(51.025,42) v1@51.025,46.725
NetC8_1: C8.1 FT1.3 FT1.7 TP6.0 | length 16.2
  Top Layer w0.25: TP6.0 40.944,27.617 42,26.561 C8.1 ; C8.1@41.95,24.133 45.833,24.133 48.004,26.304 48.004,27.129 47.233,27.9 47.233,27.967 46.443,28.757 45.888,28.757 FT1.3@45.14,28.009
NetC11_1: C11.1 J3.1 L1.1 | length 7.8
  Top Layer w0.5: L1.1 69.087,43.663 70.25,42.5 C11.1 72.8,42.5 73,42.7 J3.1
NetD1_2: D1.2 R3.2 | length 6.3
  Top Layer w0.5: R3.2 31.27,39.123 D1.2@31.27,41.742
NetD1_3: D1.3 R4.1 R7.2 | length 13.4
  Top Layer w0.5: R4.1 31.511,36.25 31.853,36.25 ; R7.2 31.853,36.25 ; D1.3@32.54,41.742 32.54,36.937 31.853,36.25
NetFT1_10: FT1.10 R9.1 | length 9
  Top Layer w0.25: FT1.10 50.725,25.787 51.262,25.25 51.69,25.25 52.605,26.165 53.428,26.165 54.221,26.958 55.223,26.958 56.015,27.75 56.445,27.75 R9.1@57.75,26.445
NetFT1_12: FT1.12 R10.1 | length 6.6
  Top Layer w0.25: FT1.12@52.054,26.865 FT1.12@52.294,26.625 ; FT1.12@52.294,26.49 52.429,26.625 53.162,26.625 54.02,27.483 54.933,27.483 55.7,28.25 57.5,28.25 R10.1@57.75,28
NetFT1_15: FT1.15 R8.1 | length 22.3
  Top Layer w0.25: FT1.15 54.336,27.974 54.753,27.974 56.015,29.236 56.015,43.442 57.673,45.1 58.998,45.1 59.251,45.353 R8.1@59.251,46.099
NetFT1_17: FT1.17 R11.2 | length 19.2
  Top Layer w0.25: R11.2 52.853,47.097 v1(52.853,45.873) ; v1(52.85,42) 52.85,41.423 53.323,40.95 54.338,40.95 55.193,40.095 55.193,37.639 53.612,36.058 53.612,35.274 54.933,33.953 54.933,32.18 FT1.17@53.957,31.204
  Bottom Layer w0.25: v1(52.85,42) 52.853,45.1 v1(52.853,45.873)
NetFT1_18: FT1.18 R12.2 | length 18.5
  Top Layer w0.25: R12.2@47.603,42.5 47.603,41.752 48.855,40.5 54.152,40.5 54.743,39.908 54.743,37.826 53.162,36.244 53.162,35.088 54.461,33.788 54.461,32.75 FT1.18@53.37,31.659
NetJ3_2: J3.2@75.2,43.5 U3.16 | length 35.2
  Top Layer w0.25: U3.16 68.75,31.98 69.2,31.53 69.2,27.75 71.2,25.75 73.477,25.75 74.5,26.773 74.5,36.655 73.58,37.575 73.129,37.575 72.647,38.057 72.647,40.942 73.125,41.42 76.099,41.42 77,42.321 77,43.25 76.75,43.5 J3.2@75.2,43.5
NetJ3_3: J3.3 U3.15 | length 36.6
  Top Layer w0.25: U3.15 67.941,31.33 68.75,30.521 68.75,27.5 71,25.25 73.614,25.25 75,26.636 75,37 73.975,38.025 73.315,38.025 73.125,38.215 73.125,40.784 73.196,40.855 76.17,40.855 77.45,42.135 77.45,43.55 76.7,44.3 J3.3
NetJP2_1: JP2.1 P2.1 | length 14.1
  Top Layer w0.5: P2.1@18.261,28.92 18.261,37.571 20.307,39.616 JP2.1 JP2.1@22.784,39.459
NetL2_A: L2.A R14.1 | length 5
  Top Layer w0.25: v1(70.75,29.995) L2.A
  Bottom Layer w0.25: 70.75,30.495 v1(70.75,29.995) R14.1@70.75,32.49
NetL2_K: L2.K U3.23 | length 12.1
  Top Layer w0.25: U3.23 67.605,36.655 68.597,36.655 70.192,38.25 71.818,38.25 73.196,36.871 73.196,35.259 72.65,34.712 L2.K
NetL3_A: L3.A R15.1 | length 3.2
  Top Layer w0.25: L3.A@72.75,28.154 72.875,28.029 v1@72.875,26.867
  Bottom Layer w0.25: R15.1 73,27.847 73,26.867 72.878,26.746 v1(72.875,26.746)
NetL3_K: L3.K U3.22 | length 18
  Top Layer w0.25: U3.22 68.555,35.88 70.289,37.614 71.62,37.614 72.66,36.575 72.66,35.359 72.2,34.899 72.2,33.95 71.635,33.385 69.835,33.385 69.303,32.853 69.303,32.063 69.65,31.716 69.65,29.297 L3.K
NetL4_K: L4.K R24.1 | length 2.5
  Top Layer w0.5: 76,20.803 L4.K@78.484,20.803
NetR2_2: R2.2 U1.5 | length 16.4
  Top Layer w0.25: U1.5 19.556,14.75 17.94,14.75 17.649,15.041 17.649,20.684 18.25,21.285 23.112,21.285 R2.2
NetR13_2: R13.2 U3.19 | length 16.5
  Top Layer w0.25: R13.2@59.097,42.425 61.478,42.425 62.607,41.296 63.899,41.296 64.625,40.57 64.625,38.114 63.6,37.089 63.6,35.175 64.82,33.955 U3.19@67.455,33.955
PGND: JP1.1 P1.1 | length 21.1
  Bottom Layer w0.5: JP1.1 23.359,47.641 25.077,45.923 25.077,32.309 P1.1@28.137,29.249
"PIO 0.1/CLKOUT": R16.2 U5.4 | length 6.9
  Top Layer w0.25: U5.4 58.602,12 60.994,12 61.704,11.289 R16.2@63.01,11.289
"PIO 0.2/SSEL0": U5.10
"PIO 0.3": R17.1 R19.2 U5.14 | length 4.5
  Top Layer w0.25: 59.15,18.865 59.513,19.228 U5.14 59.513,19.355 59.876,19.718 59.876,20.634 R17.1 60.49,21.146 R19.2
"PIO 0.4/SCL": R22.1 U5.15 U6.1 | length 42
  Top Layer w0.25: U6.1 28.647,15.518 29.234,14.93 29.61,14.93 30.386,14.154 30.386,13.129 32.781,10.734 35.207,10.734 ; R22.1 35.207,12.836 35.207,10.734 ; U5.15 59.16,19.638 58.7,19.178 58.7,18.2 58.3,17.8 57.898,17.8 57.573,17.475 47.256,17.475 43.31,13.529 40.974,13.529 38.179,10.734 35.207,10.734
  other v1: 57.986,17.75
"PIO 0.5/SDA": R23.1 U5.16 U6.3 | length 35.8
  Top Layer w0.25: U6.3 30.557,15.25 31.523,14.284 35.341,14.284 36,13.624 36,12.503 36.247,12.256 37.57,12.256 R23.1 38.397,13.276 39.099,13.979 43.082,13.979 47.028,17.925 56.675,17.925 v1(57.25,18.5) ; v1@57.392,18.584 U5.16
"PIO 0.6": U5.22 | length 0
  Top Layer w0.25: U5.22 U5.22@56.692,22.12
"PIO 0.7": FT1.26 U5.2 U5.23 | length 38.3
  Top Layer w0.25: v1(46.7,36.616) 46.7,35.666 FT1.26@47.837,34.528 ; v1(55,21.5) 55.358,21.5 U5.23 ; U5.2 56.338,12.857 56.765,12.43 56.765,11.918 v1(56.933,11.75)
  Bottom Layer w0.25: v1(46.7,36.616) 46.936,36.616 47.7,37.38 48.3,37.38 49.25,36.43 49.25,30.97 56.293,23.926 56.293,22.793 v1(55,21.5) 54.925,21.425 54.925,20.197 54.429,19.701 54.429,17.299 56.791,14.938 56.791,11.892 v1(56.933,11.75)
"PIO 0.8/MISO0": FT1.31 U5.27 | length 18.2
  Top Layer w0.25: FT1.31@45.167,31.476 45.893,30.75 v1(47.048,30.75) ; 53.088,21.757 53.088,21.345 v1(53.75,20.683)
  Bottom Layer w0.25: v1(47.048,30.75) 47.048,30.55 47.348,30.25 48.614,30.25 55.095,23.768 55.095,23.257 53.825,21.987 53.825,20.758 v1(53.75,20.683)
"PIO 0.9/MOSI0": U5.28
"PIO 0.10/SCK0": U5.29
"PIO 0.11/ADC0": U5.32
"PIO 1.0/ADC1": U5.33
"PIO 1.1/ADC2": U5.34
"PIO 1.2/ADC3": U5.35
"PIO 1.3/ADC4": U5.39
"PIO 1.4/ADC5/WAKEUP": U5.40
"PIO 1.5": FT1.25 U5.45 | length 30.3
  Top Layer w0.25: v1(48,36.655) 48,36.55 47.683,36.233 47.683,35.767 FT1.25@48.379,35.071 ; U5.45 53.272,14.464 53.272,15.099 53.156,15.215 53.192,15.25 v1(53.363,15.25)
  Bottom Layer w0.25: v1(48,36.655) 48.25,36.405 48.25,36 48.708,35.542 48.708,30.792 54.854,24.646 55.75,23.75 55.75,23.275 54.275,21.8 54.275,21.184 54.475,20.984 54.475,20.383 53.979,19.887 53.979,17.435 53.272,16.728 53.272,15.33 53.192,15.25 v1(53.363,15.25)
"PIO 1.6/RX": U4.3 U5.46 | length 16.1
  Top Layer w0.25: U4.3 46.145,19.75 v1(46.25,19.645) ; U5.46 53.951,14.388 54.434,14.388 v1(54.551,14.271)
  Bottom Layer w0.25: v1(46.25,19.645) 46.602,19.997 47.305,19.997 50.931,16.371 50.931,15.056 52.154,13.834 53.353,13.834 53.908,14.388 54.434,14.388 v1(54.551,14.271)
"PIO 1.7/TX": U4.9 U5.47 U8.9 | length 26.6
  Top Layer w0.25: U4.9 41.307,19.25 42,18.557 v1(42,15.638) ; U8.9 45.921,9.644 47.47,11.192 v1(51.843,11.192) 51.843,11.613 U5.47@53.085,12.855
  Bottom Layer w0.25: v1(42,15.638) 42.931,15.638 ; 42.948,15.655 42.966,15.655 43.174,15.447 45.553,15.447 49.877,11.123 51.773,11.123 v1(51.843,11.192)
"PIO 1.8": U5.9
"PIO 1.9": U5.17
"PIO 1.10/ADC6": U5.30
"PIO 1.11/ADC7": R20.1 U4.8 U5.42 | length 20.9
  Top Layer w0.25: U4.8 39.593,19.75 38.397,18.554 R20.1 39,17 40.4,15.6 40.959,15.6 v1(41,15.641) ; v1(50.604,13) 50.604,13.917 U5.42
  Bottom Layer w0.25: v1(41,15.641) 41,16.233 41.199,16.433 42.825,16.433 43.36,15.897 45.853,15.897 48.75,13 v1(50.604,13)
"PIO 2.1/SCK1": FT1.29 U5.13 | length 35.5
  Top Layer w0.25: v1(44.95,35.25) 45.102,35.25 45.107,35.245 45.107,35.08 44.95,34.923 44.95,33.885 FT1.29@45.916,32.919 ; U5.13 61,17.805 v1(61,17.75)
  Bottom Layer w0.25: v1(44.95,35.25) 44.856,35.344 44.856,36.55 45.28,36.975 45.78,36.975 46.146,37.341 47.024,37.341 47.513,37.83 48.487,37.83 49.752,36.565 49.752,31.104 51.65,29.206 51.827,29.206 61,20.033 v1(61,17.75)
"PIO 2.2/MISO1": U5.26
"PIO 2.3/MOSI1": FT1.30 U5.38 | length 28.7
  Top Layer w0.25: v1(44.2,34.235) 44.2,33.485 FT1.30@45.351,32.334 ; v1@48.729,14.979 v1(48.75,15) 48.858,15 U5.38
  Bottom Layer w0.25: v1(44.2,34.235) 44.2,24.289 45.162,23.327 v1(45.981,23.327) 46.281,23.027 46.281,22.469 45.525,21.713 45.525,19.345 45.95,18.92 46.55,18.92 46.88,19.25 47.416,19.25 50,16.666 50,16 49,15 v1(48.75,15)
"PIO 2.4": U5.18 | length 0.1
  Top Layer w0.25: U5.18 U5.18@58.163,20.706
"PIO 2.5": U5.21
"PIO 2.6": R25.1 U5.1 U8.8 | length 15.8
  Top Layer w0.25: U8.8 R25.1@47.282,9.144 ; R25.1 48.746,7.892 53.801,7.892 55.978,10.069 55.978,11.513 56.111,11.647 U5.1@56.111,12.37 ; U5.1@56.207,12.274 U5.1@56.111,12.37 ; U5.1@56.225,12.256 U5.1 U5.1@56.111,12.37
"PIO 2.7": U5.11
"PIO 2.8": U5.12
"PIO 2.9": L4.A U5.24 | length 24.8
  Top Layer w0.25: U5.24 56.712,23.561 61.68,23.561 62.558,22.683 65.356,22.683 65.36,22.687 65.987,22.687 65.991,22.683 70.427,22.683 71.949,24.205 76.82,24.205 78.589,22.436 L4.A
"PIO 2.10": U5.25 | length 0.5
  Top Layer w0.25: U5.25 53.786,22.473
"PIO 2.11": U5.31
"PIO 3.0": U5.36
"PIO 3.1": R1.2 TP2.0 U1.8 U5.37 | length 44.5
  Top Layer w0.25: R1.2 19.959,16.25 20.965,16.25 ; 20.962,16.253 20.965,16.25 ; U5.37 46.866,16.392 43.518,13.043 41.591,13.043 36.671,8.123 26.07,8.123 24.907,6.96 23.536,6.96 U1.8 21.065,9.845 22.444,11.223 22.444,15.056 22.25,15.25 TP2.0 22,16.75 21.5,16.25 20.965,16.25
"PIO 3.2": R21.1 U4.4 U5.43 | length 29
  Top Layer w0.25: R21.1@34.832,17 R21.1 37.398,14.429 42.542,14.429 43.393,15.28 43.393,16.832 42.75,17.475 42.75,19.307 43.693,20.25 U4.4 ; U4.4@44.693,20.25 45.407,20.25 45.807,20.65 45.807,20.857 46.281,21.331 46.413,21.413 v1(46.25,21.413) ; U5.43 52.28,14.886 v1@52.28,15.795
  Bottom Layer w0.25: v1(46.25,21.413) 46.458,21.205 47.167,21.205 ; 47.173,21.205 52.25,16.129 v1(52.25,16)
R\E\S\E\T\: R18.2 U5.3 U7.1 | length 28.7
  Top Layer w0.25: U5.3 56.685,13.147 58.939,10.893 60.831,10.893 v1(61,10.724) ; v1(63.55,23.64) U7.1@64.714,23.64
  Bottom Layer w0.25: R18.2 59.25,22.42 61.725,19.945 ; v1(61,10.724) 61.725,11.449 61.725,19.945 ; v1@63.544,23.756 61.725,21.938 61.725,19.945
TX_TO_LCD: P4.4 U8.7 | length 35.4
  Top Layer w0.25: U8.7 46.687,8.644 47.915,7.417 54.194,7.417 54.669,7.892 76.663,7.892 P4.4@78.49,9.718
USB3V3: C9.1 TP8.0 U3.4 U3.17 | length 20.7
  Top Layer w0.3: U3.4 59.78,37.93 60.808,37.93 60.878,38 62.639,38 63.125,37.515 63.125,33.423 64.148,32.4 64.852,32.4 65.082,32.63 66.261,32.63 ; C9.1@62.75,28.069 TP8.0@65.321,28.069 ; TP8.0@65.25,28.14 TP8.0@65.321,28.069 ; TP8.0@65.5,27.89 TP8.0@65.321,28.069 ; U3.17 66.261,32.63 ; TP8.0@65.321,28.069 TP8.0 65.5,31.869 66.261,32.63
USB5V: C10.2 L1.2 R13.1 R14.2 R15.2 TP7.0 U3.20 | length 35.9
  Top Layer w0.25: U3.20 69.33,34.58 69.75,35 TP7.0
  Top Layer w0.5: C10.2 57.648,37.865 57.648,43.096 58.851,44.299 ; 58.851,44.3 62.863,44.3 L1.2 65.297,41.866 65.297,37.808 64.232,36.744 64.232,35.865 65.18,34.917 65.18,34.55 ; 65.2,34.53 66.261,34.53
  Bottom Layer w0.5: TP7.0 70.75,34.647 72.397,33 R14.2 72.397,29.931 71.103,28.637 R15.2
XTALIN: C18.1 U5.6 Y2.1 | length 20.8
  Top Layer w0.25: U5.6 58.369,13.647 59.133,13.647 59.146,13.661 59.747,13.661 59.76,13.647 63.872,13.647 65.131,14.906 65.131,16.118 66.763,17.75 72.115,17.75 ; Y2.1 72.115,17.75 ; C18.1 72.115,17.503 72.115,17.75
XTALIN_XBEE: C15.1 FT1.4 Y1.1 | length 19.9
  Top Layer w0.25: v1(33.041,28.759) 34.146,28.759 Y1.1@36.491,26.415 ; Y1.1 39.775,29.69 40.991,29.69 44.028,26.652 44.943,26.652 FT1.4
  Bottom Layer w0.25: v1(33.041,28.759) 34.668,27.132 C15.1
XTALOUT: C17.1 U5.7 Y2.2 | length 11.7
  Top Layer w0.25: U5.7 58.462,14.261 60.134,14.261 62.484,16.611 C17.1 ; C17.1@63.872,16.672 Y2.2
XTALOUT_XBEE: C13.1 FT1.5 Y1.2 | length 23.8
  Top Layer w0.25: v1(33.171,20) 34.965,20 Y1.2 36.5,24.753 37.675,25.928 37.675,26.843 39.967,29.135 40.909,29.135 43.842,26.202 45.722,26.202 FT1.5@46.482,26.962
  Bottom Layer w0.25: v1@33.25,20 34.438,21.188 C13.1
pads on no net: FT1.11 FT1.20 FT1.21 FT1.32 H2.1 H4.1 J1.0 J2.0 J3.2@82.252,44.3 J3.4 J3.6 P3.1 P4.3 U3.6 U3.8 U3.9 U3.10 U3.11 U3.12 U3.13 U3.14 U3.24 U3.27 U3.28 U8.2 U8.3 U8.4 U8.5
copper on no net:
  other v3: 1.905,43.663

## Polygon pours and split planes (outlines as drawn)
3V3 on Top Layer "3V3" (solid, pour order 5): 0.483,56.058 0.483,0.381 82.144,0.381 82.144,54.739 80.691,56.388
GND on Top Layer "REG_GND" (solid, pour order 3): 26.5,55.75 26.5,39.25 43.33,39.25 43.5,39.375 43.5,55.75
GND on Bottom Layer "GND" (solid, pour order 4): 1.026,55.75 1.026,3.072 0.25,2.282 1.544,0.965 81.75,0.965 81.75,55.75

## Other copper
Top Layer:
  pour cut-out: 58.048,-0.593 58.048,3.627 cw(c61.528,3.627) 61.528,7.107 62.068,7.107 cw(c62.068,3.627) 65.548,3.627 65.548,-0.593
  pour cut-out: 17.201,-0.74 17.201,3.48 cw(c20.681,3.48) 20.681,6.96 21.221,6.96 cw(c21.221,3.48) 24.701,3.48 24.701,-0.74
  pour cut-out: 65.481,57.337 65.481,53.117 cw(c62.001,53.117) 62.001,49.637 61.461,49.637 cw(c61.461,53.117) 57.981,53.117 57.981,57.337
  pour cut-out: 24.75,57.337 24.75,53.117 cw(c21.271,53.117) 21.271,49.637 20.73,49.637 cw(c20.73,53.117) 17.25,53.117 17.25,57.337
Bottom Layer:
  pour cut-out: 0,3.099 0.026,3.072 1.026,3.072 1.026,0.975 1.016,0.965 0,0.965
  pour cut-out: 58.032,-0.593 58.032,3.627 cw(c61.512,3.627) 61.512,7.107 62.053,7.107 cw(c62.053,3.627) 65.532,3.627 65.532,-0.593
  pour cut-out: 17.164,-0.67 17.164,3.551 cw(c20.644,3.551) 20.644,7.03 21.184,7.03 cw(c21.184,3.551) 24.664,3.551 24.664,-0.67
  pour cut-out: 65.488,57.337 65.488,53.117 cw(c62.008,53.117) 62.008,49.637 61.468,49.637 cw(c61.468,53.117) 57.988,53.117 57.988,57.337
  pour cut-out: 24.721,57.332 24.721,53.111 cw(c21.241,53.111) 21.241,49.632 20.701,49.632 cw(c20.701,53.111) 17.221,53.111 17.221,57.332

## Silkscreen, mask and mechanical layers (free items; w line width, h text height)
Top Overlay:
  text "DGN:MB,CJP" at 25.428,5.27 h1
  text "RVW:WW,RM,IT,DF" at 25.403,3.581 h1
  text "Driver Display '13" at 25.429,1.875 h1
Mechanical 1:
  lines w0.5: 0.229,56.363 0.229,0.203 0.178,0.152 17.399,0.152 ; 0.279,56.363 17.424,56.363 17.424,52.527 ; 17.39,3.767 cw(c20.909,3.296) 24.435,3.708 ; 17.399,0.203 17.399,3.607 ; 17.477,52.534 ccw(c20.906,53.271) 24.359,52.654 ; 24.359,52.629 24.359,56.49 ; 24.359,56.413 58.217,56.413 58.344,56.286 ; 24.435,3.607 24.435,0.152 58.268,0.152 58.268,3.734 ; 58.217,52.934 ccw(c61.743,53.346) 65.261,52.875 ; 58.242,56.413 58.242,52.705 58.268,52.68 ; 58.259,3.839 cw(c61.777,3.313) 65.303,3.78 ; 65.227,52.705 65.227,56.464 ; 65.227,56.439 82.423,56.439 82.398,56.413 82.398,0.178 82.321,0.254 ; 65.303,3.734 65.303,0.254 82.398,0.254

## Text inside footprints (layer, text, board x,y; h text height)
J1: Top Overlay "131-040" at 10.253,24.392 h1 r90
J2: Top Overlay "131-040" at 10.211,6.934 h1 r90
P1: Top Overlay "1" at 27.742,31.318 h1.27 r270; Top Overlay "2" at 30.282,31.826 h1.27 r270; Top Overlay "4" at 30.25,25.168 h1.27 r270; Top Overlay "3" at 27.742,25.222 h1.27 r270
P2: Top Overlay "1" at 17.742,31.017 h1.27 r270; Top Overlay "2" at 20.282,31.525 h1.27 r270; Top Overlay "4" at 20.282,24.921 h1.27 r270; Top Overlay "3" at 17.742,24.921 h1.27 r270